# Altium PCB PCB1.PcbDoc
Units mm, origin at the board's own origin, x right, y up, seen from the top; angles counter-clockwise.
Board outline 191.39 x 165.1 mm, 2 copper layers (Top Layer, Bottom Layer); 70 components, 119 nets, 361 pads, 4 vias.
Unrouted connection lines stored in the file: 5.
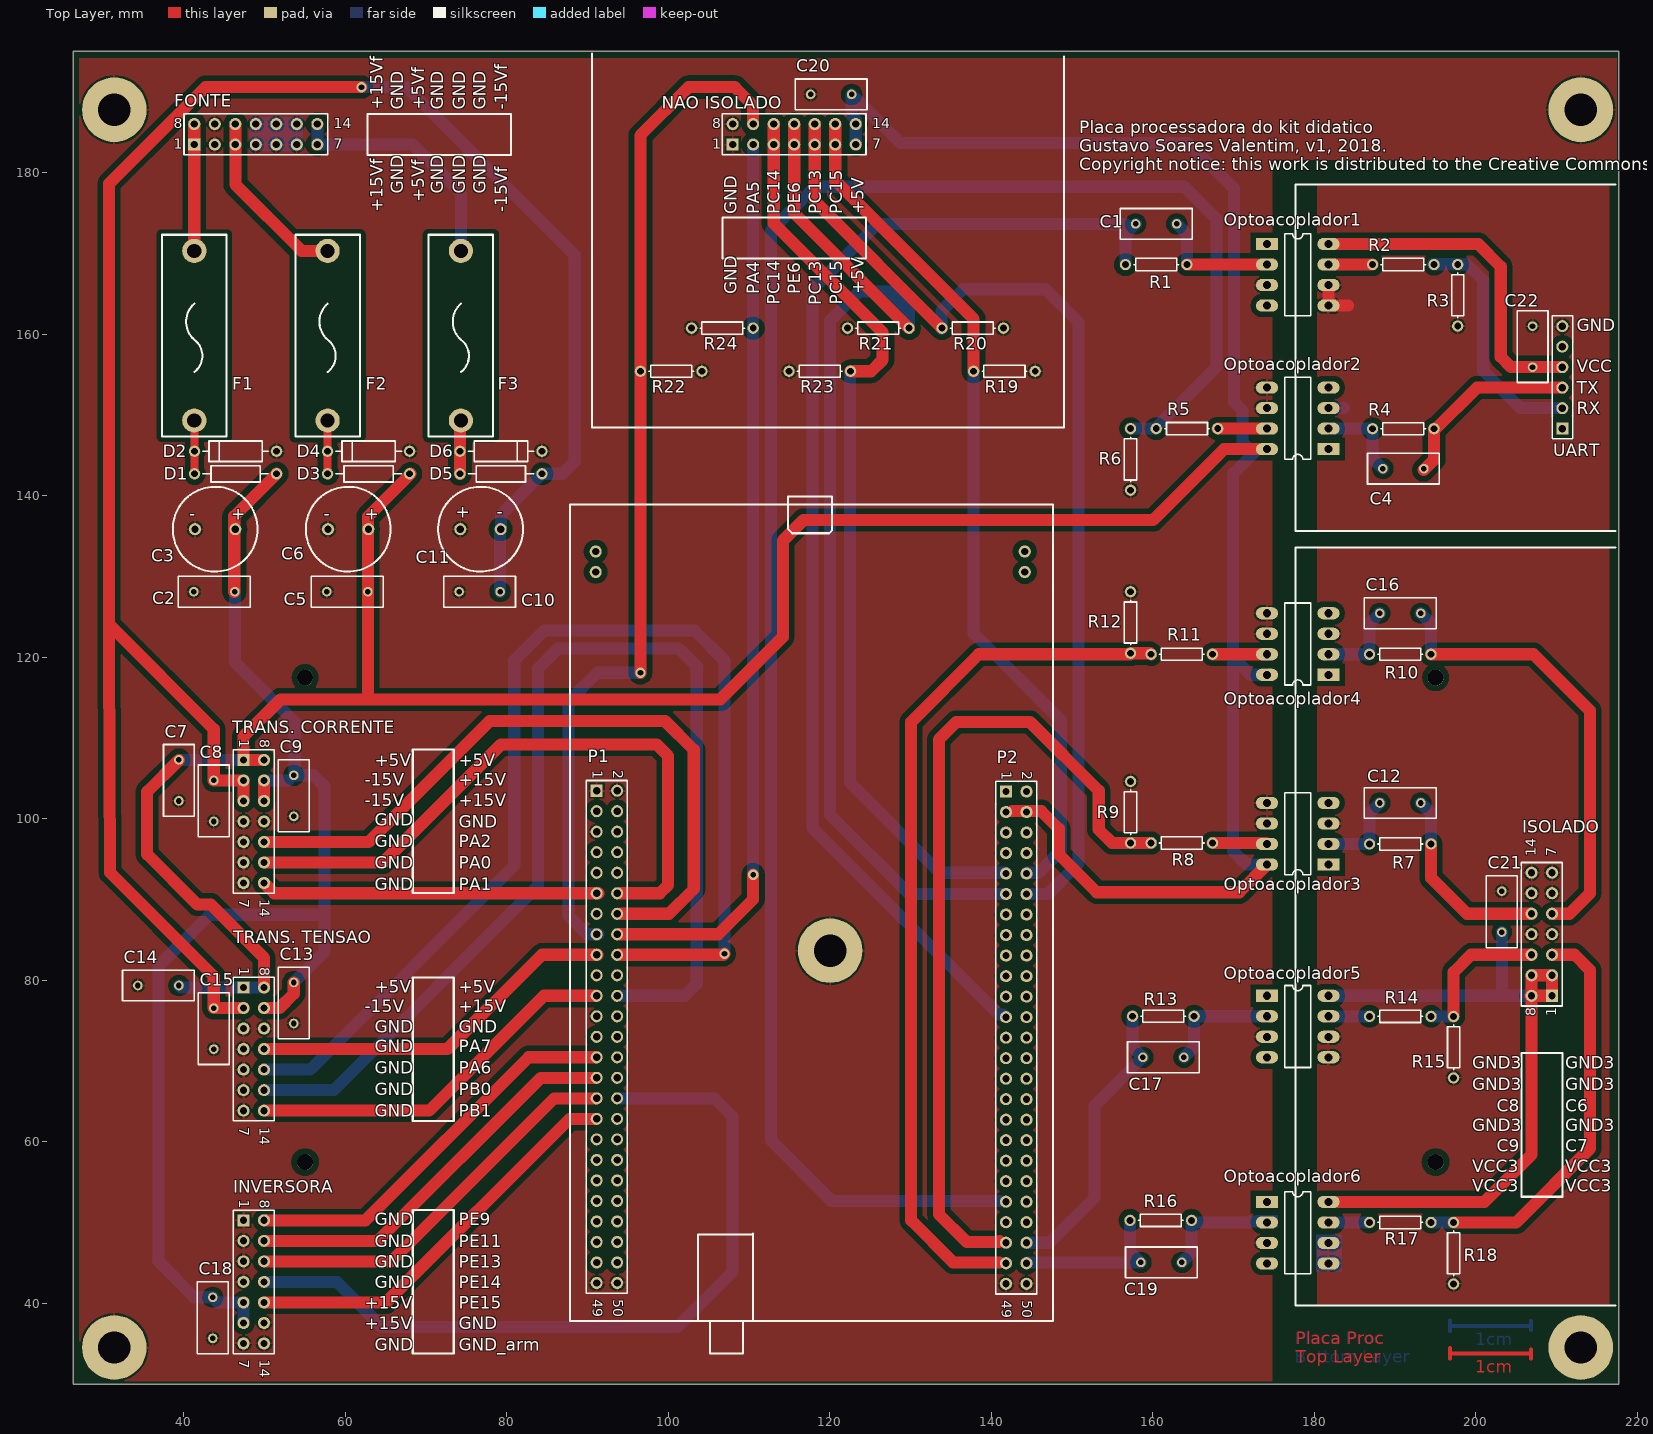
[diagram p0: Top Layer view]
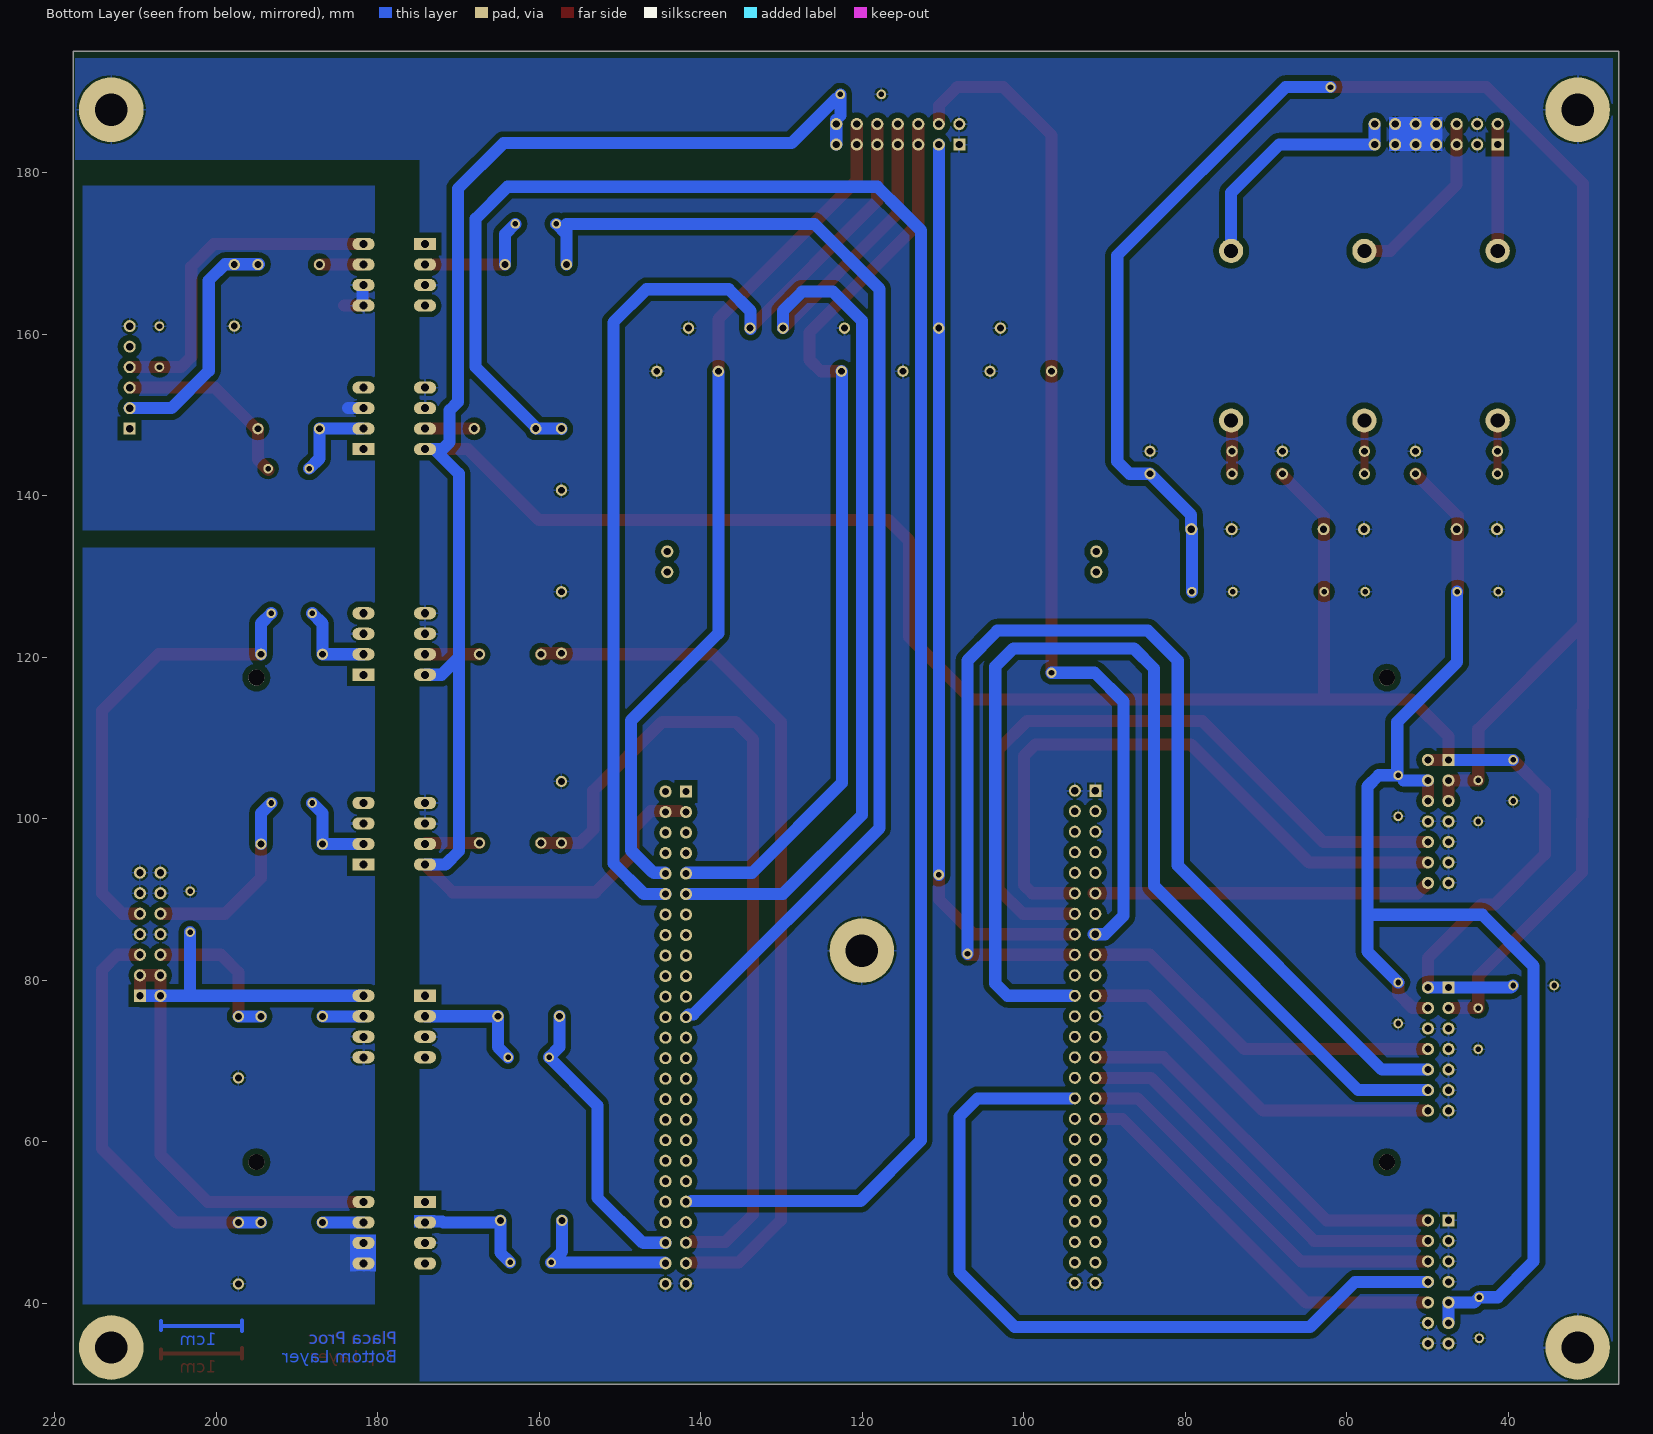
[diagram p1: Bottom Layer view, seen from below]

## Layer stack, top to bottom
Top Solder: solder mask 0.0102, Solder Resist, Dk 3.5
Top Layer: signal copper 0.0356
Dielectric 1: dielectric 0.32, FR-4, Dk 4.8
Bottom Layer: signal copper 0.0356
Bottom Solder: solder mask 0.0102, Solder Resist, Dk 3.5

## Board outline
26.289,195.072 26.289,29.972 217.678,29.972 217.678,195.072

## Design rules (kind name [scope] priority, off if disabled: settings)
Clearance Clearance_1 [All] p1: gap=0.7 ignorepadtopadclearanceinfootprint=FALSE
PlaneConnect [All] p1: planeconnectstyle=Direct reliefexpansion=0.508 reliefentries=4 reliefconductorwidth=0.254 reliefairgap=0.508
PolygonConnect [All] p1: connectstyle=Relief reliefconductorwidth=0.254 reliefentries=4 polygonreliefangle="90 Angle" airgapwidth=0.254
RoomDefinition "S bus (5.775 X 3.30 inches)" [InComponentClass('S bus (5.775 X 3.30 inches)')] p1: confinementstyle=ConfineOut formatcopy=TRUE lockcomponents=FALSE outline 358.775,194.945 298.45,194.945 298.45,25.4 358.775,25.4
RoutingVias [All] p1: holewidth=0.711 width=1.27 viastyle="Through Hole" minholewidth=0.711 minwidth=1.27 maxholewidth=0.711 maxwidth=1.27
SolderMaskExpansion [All] p1: expansion=0.102
Width [All] p1: maxlimit=1.5 minlimit=1 preferedwidth=1.5 minimp=50.000000 maximp=50.000000 favimp=50.000000 checkconnectedcopper=TRUE
29 further rules are at their usual default settings.

## Components (designator, comment, footprint, x,y, rotation, side; value= is the part's Value field where it differs from the comment)
C1 "Cerâmico 50 V 2" RAD-0.2 160.4,173.7 r180 top value=190pF
C2 "Cerâmico 50 V" RAD-0.2 43.753,128.143 r0 top value=100nF
C3 "Eletrolítico 50 V" RB5-10.5 43.863,135.89 r0 top value=10uF
C4 "Cerâmico 50 V 2" RAD-0.2 191.008,143.383 r0 top value=190pF
C5 "Cerâmico 50 V" RAD-0.2 60.225,128.143 r0 top value=100nF
C6 "Eletrolítico 50 V" RB5-10.5 60.335,135.89 r0 top value=10uF
C7 "Cerâmico 50 V" RAD-0.2 39.37,104.775 r90 top value=100nF
C8 "Cerâmico 50 V" RAD-0.2 43.688,102.235 r90 top value=100nF
C9 "Cerâmico 50 V" RAD-0.2 53.594,102.87 r90 top value=100nF
C10 "Cerâmico 50 V" RAD-0.2 76.608,128.143 r0 top value=100nF
C11 "Eletrolítico 50 V" RB5-10.5 76.718,135.89 r0 top value=10uF
C12 "Cerâmico 50 V 2" RAD-0.2 190.627,101.981 r0 top value=190pF
C13 "Cerâmico 50 V" RAD-0.2 53.594,77.216 r90 top value=100nF
C14 "Cerâmico 50 V" RAD-0.2 36.83,79.375 r0 top value=100nF
C15 "Cerâmico 50 V" RAD-0.2 43.688,74.041 r90 top value=100nF
C16 "Cerâmico 50 V 2" RAD-0.2 190.627,125.476 r0 top value=190pF
C17 "Cerâmico 50 V 2" RAD-0.2 161.29,70.485 r180 top value=190pF
C18 "Cerâmico 50 V" RAD-0.2 43.561,38.227 r270 top value=100nF
C19 "Cerâmico 50 V 2" RAD-0.2 161.036,45.085 r180 top value=190pF
C20 "Cerâmico 50 V" RAD-0.2 120.142,189.738 r180 top value=100nF
C21 "Cerâmico 50 V" RAD-0.2 203.2,88.519 r270 top value=100nF
C22 "Cerâmico 50 V" RAD-0.2 207.01,158.496 r270 top value=100nF
D1 "1N5822" AXIAL-0.4 46.393,142.748 r0 top
D2 "1N4745A" DIODE-0.4 46.393,145.542 r180 top
D3 "1N5822" AXIAL-0.4 62.865,142.748 r0 top
D4 "1N4735A" DIODE-0.4 62.865,145.542 r180 top
D5 "1N5822" AXIAL-0.4 79.248,142.748 r180 top
D6 "1N4745A" DIODE-0.4 79.248,145.542 r0 top
F1 "0.5 A" Fusivel 41.275,147.352 r90 top
F2 "0.5 A" Fusivel 57.785,147.352 r90 top
F3 "0.5 A" Fusivel 74.295,147.352 r90 top
FONTE "Header 7X2A" HDR2X7_CEN 41.275,183.515 r0 top
INVERSORA "Header 7X2A" HDR2X7_CEN 47.371,50.292 r270 top
ISOLADO "Header 7X2A" HDR2X7_CEN 209.423,78.105 r90 top
"NAO ISOLADO" "Header 7X2A" HDR2X7_CEN 107.95,183.515 r0 top
Optoacoplador1 "A2200" DIP8 174.117,171.196 r0 top
Optoacoplador2 "A2200" DIP8 181.737,145.796 r180 top
Optoacoplador3 "A2200" DIP8 181.737,94.361 r180 top
Optoacoplador4 "A2200" DIP8 181.737,117.856 r180 top
Optoacoplador5 "A2200" DIP8 174.117,78.105 r0 top
Optoacoplador6 "A2200" DIP8 174.117,52.578 r0 top
P1 "Header 25X2" HDR2X25 91.1,103.5 r270 top
P2 "Header 25X2" HDR2X25 141.8,103.4 r270 top
R1 "Res2" AXIAL-0.3 160.401,168.656 r0 top value=1K1
R2 "Res3" AXIAL-0.3 191.008,168.656 r0 top value=1K
R3 "Res4" AXIAL-0.3 197.739,164.846 r90 top value=5K
R4 "Res2" AXIAL-0.3 191.008,148.326 r180 top value=1K1
R5 "Res3" AXIAL-0.3 164.211,148.336 r180 top value=1K
R6 "Res4" AXIAL-0.3 157.226,144.526 r90 top value=5K
R7 "Res2" AXIAL-0.3 190.627,96.901 r180 top value=1K1
R8 "Res3" AXIAL-0.3 163.576,97.028 r180 top value=1K
R9 "Res4" AXIAL-0.3 157.226,100.838 r270 top value=5K
R10 "Res2" AXIAL-0.3 190.627,120.396 r180 top value=1K1
R11 "Res3" AXIAL-0.3 163.576,120.396 r180 top value=1K
R12 "Res4" AXIAL-0.3 157.226,124.333 r270 top value=5K
R13 "Res2" AXIAL-0.3 161.29,75.565 r0 top value=1K1
R14 "Res3" AXIAL-0.3 190.627,75.555 r0 top value=1K
R15 "Res4" AXIAL-0.3 197.231,71.745 r90 top value=5K
R16 "Res2" AXIAL-0.3 160.976,50.292 r0 top value=1K1
R17 "Res3" AXIAL-0.3 190.627,50.038 r0 top value=1K
R18 "Res4" AXIAL-0.3 197.231,46.228 r90 top value=5K
R19 "Res1" AXIAL-0.3 141.605,155.448 r0 top value=3.3K
R20 "Res1" AXIAL-0.3 137.668,160.782 r0 top value=3.3K
R21 "Res1" AXIAL-0.3 125.984,160.782 r180 top value=3.3K
R22 "Res1" AXIAL-0.3 100.33,155.448 r0 top value=3.3K
R23 "Res1" AXIAL-0.3 118.745,155.448 r180 top value=3.3K
R24 "Res1" AXIAL-0.3 106.68,160.782 r180 top value=3.3K
"TRANS. CORRENTE" "Header 7X2A" HDR2X7_CEN 47.371,107.315 r270 top
"TRANS. TENSAO" "Header 7X2A" HDR2X7_CEN 47.371,79.121 r270 top
UART "Header 6H" HDR1X6 210.693,148.336 r90 top

## Footprints (in the part's own frame and the unit in brackets; to place one, negate y for a bottom-side part, rotate by r counter-clockwise, add the part's x,y. Pads: shape width x height; smd on the part's side, far side on the other; paste and mask are expansions set on the pad)
AXIAL-0.3 [mm] "Axial Device, Thru-Hole; 2 Leads; 0.3 in Pin Spacing"
  round 1.4 hole 0.85: 1(-3.81,0) 2(3.81,0)
  silkscreen extent -2.77,-0.76 2.77,0.76
AXIAL-0.4 [mm] "Axial Device, Thru-Hole; 2 Leads; 0.4 in Pin Spacing"
  round 1.4 hole 0.85: 1(-5.08,0) 2(5.08,0)
  silkscreen extent -4.06,-1.02 4.06,1.02
DIODE-0.4 [mm] "Diode, Thru-Hole; 2 Leads; 0.4 in Pin Spacing"
  round 1.4 hole 0.85: 1(-5.08,0) 2(5.08,0)
  silkscreen extent -4.06,-1.27 4.06,1.27
DIP8 [mm]
  rect 2.75x1.5 hole 1: 1(0,0)
  oval 2.75x1.5 hole 1: 2(0,-2.54) 3(0,-5.08) 4(0,-7.62) 5(7.62,0) 6(7.62,-2.54) 7(7.62,-5.08) 8(7.62,-7.62)
  silkscreen extent 2.21,-8.89 5.41,1.27
Fusivel [mm]
  round 3 hole 1.75: 1(2,0) 2(23,0)
  silkscreen extent 0,-4 25,4, body extent 0,-4 25,4, height 20
HDR1X6 [mm]
  rect 1.5x1.5 hole 0.9: 1(0,0)
  round 1.5 hole 0.9: 2(2.54,0) 3(5.08,0) 4(7.62,0) 5(10.16,0) 6(12.7,0)
  silkscreen extent -1.27,-1.27 13.97,1.27, body extent -1.02,-1.02 13.72,1.02, height 5.08
HDR2X7_CEN [mm] "Connector; Header; 7x2 Position"
  rect 1.5x1.5 hole 0.9: 1(0,0)
  round 1.5 hole 0.9: 2(2.54,0) 3(5.08,0) 4(7.62,0) 5(10.16,0) 6(12.7,0) 7(15.24,0) 8(0,2.54) 9(2.54,2.54) 10(5.08,2.54) 11(7.62,2.54) 12(10.16,2.54) 13(12.7,2.54) 14(15.24,2.54)
  silkscreen extent -1.27,-1.27 16.51,3.81
HDR2X25 [mm] "Connector; Header; 25x2 Position"
  rect 1.5x1.5 hole 0.9: 1(0,0)
  round 1.5 hole 0.9: 2(0,2.54) 3(2.54,0) 4(2.54,2.54) 5(5.08,0) 6(5.08,2.54) 7(7.62,0) 8(7.62,2.54) 9(10.16,0) 10(10.16,2.54) 11(12.7,0) 12(12.7,2.54) 13(15.24,0) 14(15.24,2.54) 15(17.78,0) 16(17.78,2.54) 17(20.32,0) 18(20.32,2.54) 19(22.86,0) 20(22.86,2.54) 21(25.4,0) 22(25.4,2.54) 23(27.94,0) 24(27.94,2.54) 25(30.48,0) 26(30.48,2.54) 27(33.02,0) 28(33.02,2.54) 29(35.56,0) 30(35.56,2.54) 31(38.1,0) 32(38.1,2.54) 33(40.64,0) 34(40.64,2.54) 35(43.18,0) 36(43.18,2.54) 37(45.72,0) 38(45.72,2.54) 39(48.26,0) 40(48.26,2.54) 41(50.8,0) 42(50.8,2.54) 43(53.34,0) 44(53.34,2.54) 45(55.88,0) 46(55.88,2.54) 47(58.42,0) 48(58.42,2.54) 49(60.96,0) 50(60.96,2.54)
  silkscreen extent -1.27,-1.27 62.23,3.81
RAD-0.2 [mm] "Radial Cap, Thru-Hole; 2 Leads; 0.2 in Pin Spacing"
  round 1.2 hole 0.7: 1(-2.54,0) 2(2.54,0)
  silkscreen extent -4.44,-1.91 4.44,1.91
RB5-10.5 [mm] "Capacitor (Radial); 2 Leads"
  round 1.5 hole 0.9: 1(-2.5,0) 2(2.5,0)
  silkscreen extent -5.25,-5.25 5.25,5.25

## Part data
C1 C2 C3 C4 C5 C6 C7 C8 C9 C10 C11 C12 C13 C14 C15 C16 C17 C18 C19 C20 C21 C22: library part Cap, "Capacitor", LatestRevisionDate=17-Jul-2002, LatestRevisionNote="Re-released for DXP Platform.", PackageDescription="Radial Cap, Thru-Hole; 2 Leads; 0.3 in Pin Spacing", PackageReference=RAD-0.3, Published=8-Jun-2000, Publisher="Altium Limited"
D1 D3 D5: library part Diode, "Default Diode", Code_JEDEC=DO-214-AB, LatestRevisionDate=17-Jul-2002, LatestRevisionNote="Re-released for DXP Platform.", PackageDescription="DO-214-AB/SMC; 2 C-Bend Leads; Body 7.9 x 5.9 mm, inc. leads (LxW)", PackageReference=SMC, PackageVersion=Sep-1996, Published=8-Jun-2000, Publisher="Altium Limited"
D2 D4 D6: library part "D Zener", "Zener Diode", LatestRevisionDate=17-Jul-2002, LatestRevisionNote="Re-released for DXP Platform.", PackageDescription="Diode, Thru-Hole; 2 Leads; 0.7 in Pin Spacing", PackageReference=DIODE-0.7, Published=8-Jun-2000, Publisher="Altium Limited"
F1 F2 F3: library part "Fuse 2", "Fuse", LatestRevisionDate=17-Jul-2002, LatestRevisionNote="Re-released for DXP Platform.", PackageDescription="Thru-Hole; 2 Leads", PackageReference=PIN-W2/E2.8, Published=8-Jun-2000, Publisher="Altium Limited"
FONTE INVERSORA ISOLADO "NAO ISOLADO" "TRANS. CORRENTE" "TRANS. TENSAO": "Header, 7-Pin, Dual row", LatestRevisionDate=17-Jul-2002, LatestRevisionNote="Re-released for DXP Platform.", Publisher="Altium Limited"
Optoacoplador1 Optoacoplador2 Optoacoplador3 Optoacoplador4 Optoacoplador5 Optoacoplador6: library part Optoacoplador
P1 P2: "Header, 25-Pin, Dual row", LatestRevisionDate=17-Jul-2002, LatestRevisionNote="Re-released for DXP Platform.", Publisher="Altium Limited"
R1 R2 R3 R4 R5 R6 R7 R8 R9 R10 R11 R12 R13 R14 R15 R16 R17 R18: library part Res1, "Resistor", LatestRevisionDate=17-Jul-2002, LatestRevisionNote="Re-released for DXP Platform.", PackageDescription="Axial Device, Thru-Hole; 2 Leads; 0.3 in Pin Spacing", PackageReference=AXIAL-0.3, Published=8-Jun-2000, Publisher="Altium Limited"
R19 R20 R21 R22 R23 R24: "Resistor", LatestRevisionDate=17-Jul-2002, LatestRevisionNote="Re-released for DXP Platform.", PackageDescription="Axial Device, Thru-Hole; 2 Leads; 0.3 in Pin Spacing", PackageReference=AXIAL-0.3, Published=8-Jun-2000, Publisher="Altium Limited"
UART: "Header, 6-Pin, Right Angle", LatestRevisionDate=17-Jul-2002, LatestRevisionNote="Re-released for DXP Platform.", Publisher="Altium Limited"

## Free pads (board coordinates)
  round 8 hole 4: 10(31.369,34.544) 10(31.369,187.833) 10(120.015,83.693) 10(212.979,34.544) 10(212.979,187.833)
  round 1.5 hole 0.9: 11(90.983,130.583) 11(90.983,133.123)
  round 1.524 hole 0.9: 11(144.121,130.583) 11(144.121,133.123)
  round 2 hole 2 paste+2: 12(55,117.5) 13(55,57.5) 14(195,57.5) 15(195,117.5)

## Via types
v1: diameter 1.27, hole 0.711, Top Layer to Bottom Layer, 4 vias

## Nets (pads, with @x,y where several pads share a name; then routed paths per layer and width w, separated by ;. In a path a pad name is that pad's centre, name@x,y a point inside that pad or via, vN(x,y) a via of type N, cw(c..) or ccw(c..) an arc to the next point about the centre after c; other vN are vias at no path point)
"+3 V ARM": P2.6
"+ 3 V ARM": P2.5
"+ 5 V": "NAO ISOLADO.7" "NAO ISOLADO.14" "TRANS. CORRENTE.1" "TRANS. CORRENTE.8" "TRANS. TENSAO.1" "TRANS. TENSAO.8" C5.2 C6.2 C7.2 C14.2 C20.1 D3.2 Optoacoplador2.5 Optoacoplador3.5 Optoacoplador4.5 P2.3 P2.4 | length 431.6
  Top Layer w1.5: C7.2 35.433,103.378 35.433,95.631 41.656,89.408 43.307,89.408 49.911,82.804 49.911,79.121 ; 49.911,107.315 47.371,107.315 47.371,110.236 51.943,114.808 106.426,114.808 114.173,122.555 114.173,134.493 116.713,137.033 160.02,137.033 168.783,145.796 Optoacoplador2.5 Optoacoplador2.5@174.244,145.796 ; 62.865,115.189 62.765,115.289 C5.2 62.765,137.441 D3.2@68.072,142.748 ; 142.621,100.965 146.177,100.965 148.336,98.806 148.336,95.631 153.035,90.932 170.688,90.932 Optoacoplador3.5
  Bottom Layer w1.5: C14.2 39.624,79.121 47.371,79.121 49.911,79.121 ; C7.2 47.371,107.315 ; 122.682,187.134 C20.1 ; 123.19,183.515 123.19,186.055 123.19,186.626 ; 123.19,189.23 128.72,183.7 164.4,183.7 170.053,178.047 170.053,151.638 171.069,150.622 171.069,146.685 171.958,145.796 Optoacoplador2.5@172.974,145.796 ; Optoacoplador3.5 171.577,94.361 169.926,96.012 169.926,120.015 ; Optoacoplador4.5 172.085,117.856 169.926,120.015 ; Optoacoplador2.5 Optoacoplador2.5@172.974,145.796 ; 169.926,120.015 169.926,142.748 Optoacoplador2.5@172.974,145.796
"+ 5 Vf": F2.2 FONTE.3 FONTE.10 | length 22.3
  Top Layer w1.5: FONTE.10 FONTE.3 46.355,178.562 54.565,170.352 F2.2
"+ 15 V": "TRANS. CORRENTE.9" "TRANS. CORRENTE.10" "TRANS. TENSAO.9" C2.2 C3.2 C9.2 C13.2 C18.1 D1.2 INVERSORA.5 INVERSORA.6 | length 159.1
  Top Layer w0: C3.2@46.293,135.828 C3.2@46.355,135.89
  Top Layer w1.5: C2.2@46.228,128.143 46.228,137.503 D1.2 ; 49.911,76.581 51.816,76.581 53.594,78.359 C13.2 ; 49.911,102.235 49.911,104.775
  Bottom Layer w1.5: C2.2 46.293,119.442 53.721,112.014 53.721,105.41 56.007,105.41 57.404,104.013 57.404,88.138 ; INVERSORA.6 INVERSORA.5 44.196,40.132 C18.1 41.275,40.767 36.83,45.212 36.83,81.788 43.18,88.138 57.404,88.138 ; 49.911,104.775 52.959,104.775 ; C13.2 57.404,83.566 57.404,88.138
"+ 15 Vf": F1.2 FONTE.1 FONTE.8 | length 16.1
  Top Layer w1.5: F1.2@41.275,169.971 F1.2 FONTE.1 FONTE.8
"- 15 V": "TRANS. CORRENTE.2" "TRANS. CORRENTE.3" "TRANS. TENSAO.2" C8.2 C10.2 C11.2 C15.2 D5.1 | length 260.1
  Top Layer w1.5: 47.371,76.581 C15.2 43.688,80.518 30.852,93.354 30.725,120.419 30.734,120.428 30.734,124.079 ; 47.371,102.235 47.371,104.775 C8.2 43.688,111.125 30.734,124.079 ; v1(61.976,190.627) 42.672,190.627 30.734,178.689 30.734,124.079
  Bottom Layer w1.5: v1(61.976,190.627) 67.564,190.627 88.392,169.799 88.392,144.272 86.868,142.748 D5.1 79.248,137.668 C11.2@79.248,136.017 ; C10.2 79.148,135.79 C11.2@79.248,135.89
"- 15 Vf": F3.2 FONTE.7 FONTE.14 | length 29.9
  Bottom Layer w1.5: FONTE.14 FONTE.7 68.326,183.515 74.295,177.546 F3.2@74.295,170.434
BOOT0: P2.21
C6: C16.2 ISOLADO.5 R10.1 | length 56.5
  Top Layer w1.5: R10.1 207.137,120.396 214.122,113.411 214.122,90.805 211.582,88.265 ISOLADO.5
  Bottom Layer w1.5: C16.2 194.437,124.206 R10.1
C7: ISOLADO.3 R17.2 R18.2 | length 51.1
  Top Layer w1.5: R18.2 204.978,50.038 214.122,59.182 214.122,81.28 212.217,83.185 ISOLADO.3
  Bottom Layer w1.5: R17.2 R18.2
C8: C12.2 ISOLADO.12 R7.1 | length 24.1
  Top Layer w1.5: R7.1 194.437,92.71 198.882,88.265 ISOLADO.12
  Bottom Layer w1.5: C12.2 194.437,100.711 R7.1
C9: ISOLADO.10 R14.2 R15.2 | length 18.8
  Top Layer w1.5: R15.2 197.231,81.026 199.39,83.185 ISOLADO.10
  Bottom Layer w1.5: R14.2 R15.2
GND: "NAO ISOLADO.1" "NAO ISOLADO.8" "TRANS. CORRENTE.4" "TRANS. CORRENTE.5" "TRANS. CORRENTE.6" "TRANS. CORRENTE.7" "TRANS. CORRENTE.11" "TRANS. TENSAO.3" "TRANS. TENSAO.4" "TRANS. TENSAO.5" "TRANS. TENSAO.6" "TRANS. TENSAO.7" "TRANS. TENSAO.10" C2.1 C3.1 C5.1 C6.1 C7.1 C8.1 C9.1 C10.1 C11.1 C13.1 C14.1 C15.1 C18.2 C20.2 D2.1 D4.1 D6.2 FONTE.2 FONTE.4 FONTE.5 FONTE.6 FONTE.9 FONTE.11 FONTE.12 FONTE.13 INVERSORA.1 INVERSORA.2 INVERSORA.3 INVERSORA.4 INVERSORA.7 INVERSORA.13 INVERSORA.14 Optoacoplador1.3 Optoacoplador2.7 Optoacoplador2.8 Optoacoplador3.7 Optoacoplador3.8 Optoacoplador4.7 Optoacoplador4.8 Optoacoplador5.3 Optoacoplador6.3 P1.1 P1.2 P1.5 P1.23 P1.49 P1.50 P2.49 P2.50 pad.10 R6.1 R9.1 R12.1 R19.2 R20.2 R21.2 R22.2 R23.2 R24.2
"GND ARM": P2.1 P2.2
"GND uart": C22.1 Optoacoplador1.7 Optoacoplador1.8 Optoacoplador2.3 R3.1 UART.6 | length 9.3
  Top Layer w1.5: Optoacoplador1.7@181.61,166.116 181.737,165.989 Optoacoplador1.8 184.15,163.576
  Bottom Layer w1.5: Optoacoplador2.3@181.864,150.876 183.642,150.876 ; Optoacoplador1.8@181.864,163.576 Optoacoplador1.7@181.864,166.116
GND_3: C21.1 ISOLADO.4 ISOLADO.6 ISOLADO.7 ISOLADO.11 ISOLADO.13 ISOLADO.14 Optoacoplador3.3 Optoacoplador4.3 Optoacoplador5.7 Optoacoplador5.8 Optoacoplador6.7 Optoacoplador6.8 R15.1 R18.1
NC: P1.48
NetC1_1: C1.1 Optoacoplador1.2 R1.2 | length 14.1
  Top Layer w1.5: R1.2 Optoacoplador1.2@172.974,168.656
  Bottom Layer w1.5: C1.1 164.2,172.44 164.2,171.1 ; R1.2 164.211,170.889
NetC4_1: C4.1 Optoacoplador2.2 R4.2 | length 10.8
  Bottom Layer w1.5: Optoacoplador2.2@181.864,148.336 187.188,148.336 R4.2 187.198,144.653 C4.1
NetC12_1: C12.1 Optoacoplador3.2 R7.2 | length 10.7
  Bottom Layer w1.5: Optoacoplador3.2 R7.2 186.817,100.711 C12.1
NetC16_1: C16.1 Optoacoplador4.2 R10.2 | length 10.7
  Bottom Layer w1.5: Optoacoplador4.2 R10.2 186.817,124.206 C16.1
NetC17_1: C17.1 Optoacoplador5.2 R13.2 | length 14.8
  Top Layer w0: Optoacoplador5.2@173.99,75.692 Optoacoplador5.2
  Bottom Layer w1.5: C17.1 165.1,71.755 R13.2 Optoacoplador5.2
NetC19_1: C19.1 Optoacoplador6.2 R16.2 | length 15.2
  Bottom Layer w1.5: C19.1 164.786,46.295 R16.2 165.04,50.038 171.86,50.038 171.987,50.165 173.99,50.165 Optoacoplador6.2
NetD1_1: D1.1 D2.2 F1.1 | length 6.5
  Top Layer w1: D1.1 D2.2 41.313,149.136 F1.1@41.402,149.225
NetD3_1: D3.1 D4.2 F2.1 | length 6.6
  Top Layer w1: D3.1 D4.2 F2.1
NetD5_2: D5.2 D6.1 F3.1 | length 6.4
  Top Layer w1.5: D5.2 D6.1 74.168,148.971 F3.1@74.295,149.098
NetOptoacoplador1_6: Optoacoplador1.6 R2.1 | length 5.3
  Top Layer w1.5: Optoacoplador1.6@181.864,168.656 R2.1
NetOptoacoplador2_6: Optoacoplador2.6 R5.1 | length 6.2
  Top Layer w1.5: R5.1 Optoacoplador2.6 Optoacoplador2.6@174.244,148.336
NetOptoacoplador3_6: Optoacoplador3.6 R8.1 | length 6.8
  Top Layer w1.5: R8.1 173.99,97.028 Optoacoplador3.6
NetOptoacoplador4_6: Optoacoplador4.6 R11.1 | length 6.7
  Top Layer w1.5: R11.1 Optoacoplador4.6
NetOptoacoplador5_6: Optoacoplador5.6 R14.1 | length 5.1
  Bottom Layer w1.5: Optoacoplador5.6 181.747,75.555 R14.1 R14.1@186.807,75.565
NetOptoacoplador6_6: Optoacoplador6.6 R17.1 | length 5.1
  Bottom Layer w1.5: Optoacoplador6.6 R17.1
NRST: P1.6
PA0: "TRANS. CORRENTE.13" P1.12 | length 79
  Top Layer w1.5: 49.911,94.615 64.643,94.615 79.248,109.22 98.552,109.22 99.961,107.811 99.961,91.833 98.933,90.805 P1.12@94,90.805
PA1: "TRANS. CORRENTE.14" P1.11 | length 41.9
  Top Layer w1.5: 49.911,92.075 51.181,90.805 P1.11@91.3,90.805
PA2: "TRANS. CORRENTE.12" P1.14 | length 88.5
  Top Layer w1.5: 49.911,97.155 62.865,97.155 77.851,112.141 99.568,112.141 103.124,108.585 103.124,91.313 100.076,88.265 P1.14@94.1,88.265
PA3: P1.13
PA4: "NAO ISOLADO.2" P1.16 R24.1 | length 111.9
  Top Layer w1.5: P1.16@93.9,85.725 106.172,85.725 110.49,90.043 v1(110.49,93.091)
  Bottom Layer w1.5: v1(110.49,93.091) R24.1 110.49,183.515
PA5: "NAO ISOLADO.9" P1.15 R22.1 | length 127.7
  Top Layer w1.5: v1(96.52,118.11) R22.1 96.52,184.658 102.489,190.627 108.204,190.627 110.49,188.341 110.49,186.055
  Bottom Layer w1.5: P1.15@91.3,85.725 89.916,85.725 87.63,88.011 87.63,114.554 91.186,118.11 v1(96.52,118.11)
PA6: "TRANS. TENSAO.12" P1.18 | length 145.4
  Top Layer w1.5: P1.18@93.9,83.185 106.807,83.185 v1(106.934,83.312)
  Bottom Layer w1.5: 49.911,68.961 55.626,68.961 80.899,94.234 80.899,119.634 84.582,123.317 103.251,123.317 106.934,119.634 v1(106.934,83.312)
PA7: "TRANS. TENSAO.11" P1.17 | length 46.1
  Top Layer w1.5: 49.911,71.501 72.644,71.501 84.328,83.185 P1.17@91.2,83.185
PA8: P2.43
PA9: P2.44
PA10: P2.41 R5.2 R6.2 | length 235.6
  Bottom Layer w1.5: P2.41@141.1,52.7 120.2,52.7 112.69,60.21 112.69,172.89 115.1,175.3 118.1,178.3 163.9,178.3 167.853,174.347 167.853,155.953 R5.2@160.236,148.336 ; R6.2@157.2,148.3 157.236,148.336 R5.2@160.236,148.336 ; R5.2 R5.2@160.236,148.336
PA13: P2.42
PA14: P2.39
PA15: P2.40
PB0: "TRANS. TENSAO.13" P1.22 | length 142.2
  Bottom Layer w1.5: 49.911,66.421 58.547,66.421 83.82,91.694 83.82,118.618 86.319,121.117 101.26,121.117 103.505,118.872 103.505,79.629 101.981,78.105 P1.22@94.1,78.105
PB1: "TRANS. TENSAO.14" P1.21 | length 47.1
  Top Layer w1.5: 49.911,63.881 70.358,63.881 84.582,78.105 P1.21@91.1,78.105
PB2: P1.24
PB3: P2.28
PB4: P2.25
PB5: P2.26
PB6: C1.2 P2.23 R1.1 | length 149.3
  Bottom Layer w1.5: P2.23 141.46,75.8 140.889,75.8 117.824,98.865 117.824,165.624 125.9,173.7 156.6,173.7 156.6,172.44 ; R1.1@156.6,168.7 156.6,172.44 ; C1.2 156.6,172.44
PB7: P2.24
PB8: P2.19
PB9: P2.20
PB10: P1.34
PB11: P1.35
PB12: P1.36
PB13: P1.37
PB14: P1.38
PB15: P1.39
PC0: P1.8
PC1: P1.7
PC2: P1.10
PC3: P1.9
PC4: P1.20
PC5: P1.19
PC6: P2.47 R11.2 R12.2 | length 108.1
  Top Layer w1.5: 140.985,45.085 135.255,45.085 130.048,50.292 130.048,112.014 138.43,120.396 R12.2@157.226,120.396 ; R12.2 159.639,120.523 R11.2
PC7: C19.2 P2.48 R16.1 | length 19.9
  Bottom Layer w1.5: P2.48@144.4,45.085 C19.2 157.166,46.415 R16.1
PC8: P2.45 R8.2 R9.2 | length 104
  Top Layer w1.5: 141,47.7 140.9,47.6 136.931,47.6 133.477,51.054 133.477,109.855 135.636,112.014 144.78,112.014 153.289,103.505 153.289,98.679 154.94,97.028 R9.2 R8.2
PC9: C17.2 P2.46 R13.1 | length 35.9
  Bottom Layer w1.5: P2.46 147.08,47.52 ; 147.32,47.625 152.781,53.086 152.781,64.516 C17.2 157.48,71.755 R13.1
PC10: P2.37
PC11: P2.38
PC12: P2.35
PC13: "NAO ISOLADO.5" "NAO ISOLADO.12" P2.12 R20.1 | length 128.8
  Top Layer w1.5: 118.11,186.055 118.11,183.515 118.11,176.53 R20.1
  Bottom Layer w1.5: R20.1@133.8,160.7 133.8,162.9 136.5,165.6 146.7,165.6 150.8,161.5 150.8,94.5 147,90.7 P2.12
PC14: "NAO ISOLADO.3" "NAO ISOLADO.10" P2.9 R23.1 | length 114.1
  Top Layer w1.5: 113.03,186.055 113.03,183.515 113.03,173.736 126.492,160.274 126.492,156.845 125.095,155.448 R23.1
  Bottom Layer w1.5: R23.1 122.5,155.393 122.5,104.449 133.604,93.345 P2.9@141.7,93.345
PC15: "NAO ISOLADO.6" "NAO ISOLADO.13" P2.10 R19.1 | length 106.5
  Top Layer w1.5: 120.65,186.055 120.65,183.515 120.65,179.07 137.795,161.925 R19.1
  Bottom Layer w1.5: R19.1@137.795,155.321 137.795,123.005 148.6,112.2 148.6,96.1 145.941,93.441 ; P2.10@144.4,93.34 145.74,93.34
PD0: P2.36
PD1: P2.33
PD2: P2.34
PD3: P2.31
PD4: P2.32
PD5: P2.29
PD6: P2.30
PD7: P2.27
PD8: P1.40
PD9: P1.41
PD10: P1.42
PD11: P1.43
PD12: P1.44
PD13: P1.45
PD14: P1.46
PD15: P1.47
PE0: P2.17
PE1: P2.18
PE2: P2.15
PE3: P2.16
PE4: P2.13
PE5: P2.14
PE6: "NAO ISOLADO.4" "NAO ISOLADO.11" P2.11 R21.1 | length 132.6
  Top Layer w1.5: 115.57,186.055 115.57,183.515 115.57,175.006 R21.1
  Bottom Layer w1.5: R21.1@129.8,160.8 129.8,162.9 127.4,165.3 123.6,165.3 120.024,161.724 120.024,100.476 129.8,90.7 P2.11
PE7: P1.25
PE8: P1.26
PE9: INVERSORA.8 P1.27 | length 49.6
  Top Layer w1.5: INVERSORA.8 62.484,50.292 82.677,70.485 P1.27@91.1,70.485
PE10: P1.28
PE11: INVERSORA.9 P1.29 | length 49.6
  Top Layer w1.5: INVERSORA.9 64.008,47.752 84.201,67.945 P1.29@91.1,67.945
PE12: P1.30
PE13: INVERSORA.10 P1.31 | length 49.6
  Top Layer w1.5: INVERSORA.10 65.659,45.212 85.852,65.405 P1.31@91.1,65.405
PE14: INVERSORA.11 P1.32 | length 97.3
  Bottom Layer w1.5: INVERSORA.11 58.928,42.672 64.516,37.084 101.092,37.084 107.95,43.942 107.95,63.119 105.664,65.405 P1.32@94,65.405
PE15: INVERSORA.12 P1.33 | length 50.6
  Top Layer w1.5: INVERSORA.12 65.024,40.132 87.757,62.865 P1.33@91.1,62.865
PH0: P2.7
PH1: P2.8
RX: R2.2 R3.2 UART.2 | length 29.9
  Bottom Layer w1.5: R2.2@194.7,168.7 198.9,168.7 200.9,166.7 200.9,155.5 205.524,150.876 UART.2
TX: C4.2 R4.1 UART.3 | length 23.6
  Top Layer w1.5: C4.2@193.5,143.2 194.818,144.518 R4.1 ; R4.1@194.9,148.2 200.116,153.416 UART.3
VCC_3: C21.2 ISOLADO.1 ISOLADO.2 ISOLADO.8 ISOLADO.9 Optoacoplador5.5 Optoacoplador6.5 | length 93
  Top Layer w1.5: Optoacoplador6.5 201.041,52.578 206.883,58.42 ISOLADO.8 ISOLADO.1 ISOLADO.2 ISOLADO.9 206.883,78.232 ISOLADO.8@206.756,78.105
  Bottom Layer w1.5: Optoacoplador5.5 203.2,78.105 ; C21.2 203.2,78.105 ; ISOLADO.1 ISOLADO.8 203.2,78.105
VCC_uart: C22.2 Optoacoplador1.5 UART.4 | length 41.7
  Top Layer w1.5: Optoacoplador1.5@181.864,171.196 200.279,171.196 203.073,168.402 203.073,157.226 204.343,155.956 C22.2 UART.4
VDD: P1.3 P1.4 P2.22
pads on no net: Optoacoplador1.1 Optoacoplador1.4 Optoacoplador2.1 Optoacoplador2.4 Optoacoplador3.1 Optoacoplador3.4 Optoacoplador4.1 Optoacoplador4.4 Optoacoplador5.1 Optoacoplador5.4 Optoacoplador6.1 Optoacoplador6.4 UART.1 UART.5
copper on no net: | length 24.8
  Top Layer w0.5: 196.8,33.2 196.8,34.5 ; 196.8,33.8 206.8,33.8 ; 206.8,33.2 206.8,34.3
  Bottom Layer w0.5: 196.8,36.6 196.8,37.9 ; 196.8,37.2 206.8,37.2 ; 206.8,36.7 206.8,37.8

## Polygon pours and split planes (outlines as drawn)
GND_3 on Top Layer "GND_3_L01_P012" (solid, remove dead copper, pour order 12): 180.34,133.604 180.34,39.878 216.535,39.878 216.535,133.604
GND on Top Layer "GND_L01_P018" (solid, remove dead copper, pour order 18): 27.051,194.183 27.051,30.353 174.752,30.353 174.752,37.846 174.752,38.862 174.752,181.61 217.424,181.61 217.424,194.183 150.622,194.183 90.17,194.183
"GND uart" on Top Layer "GND_UART_L01_P008" (solid, remove dead copper, pour order 8): 180.34,178.435 216.535,178.435 216.535,135.763 180.34,135.763
GND_3 on Bottom Layer "GND_3_L02_P014" (solid, remove dead copper, pour order 14): 180.34,39.878 180.34,133.604 216.535,133.604 216.535,39.878
"GND uart" on Bottom Layer "GND_UART_L02_P010" (solid, remove dead copper, pour order 10): 180.34,178.435 216.535,178.435 216.535,135.763 180.34,135.763
GND on Bottom Layer "GND_L02_P020" (solid, remove dead copper, pour order 20): 27.051,194.183 27.051,30.353 174.752,30.353 174.752,37.846 174.752,181.61 217.424,181.61 217.424,194.183 150.622,194.183 90.17,194.183

## Other copper
Top Layer:
  text "Placa Proc / Top Layer" at 177.673,32.639 h1.52
  text "1cm" at 199.9,31.4 h1.52
Bottom Layer:
  rectangle net NetC19_1: 172.847,49.403 175.514,50.927
  rectangle net GND_3: 180.213,43.942 183.388,48.514
  rectangle net GND: 48.133,182.753 54.737,186.944
  text "1cm" at 199.9,34.8 h1.52
  text "Placa Proc / Bottom Layer" at 177.546,32.639 h1.52

## Silkscreen, mask and mechanical layers (free items; w line width, h text height)
Top Overlay:
  lines w0.254: 90.551,194.818 90.551,192.405 90.551,148.463 148.971,148.463 148.971,188.468 148.971,194.437 ; 103.632,37.846 103.632,48.514 110.363,48.514 110.49,48.641 110.49,37.846 105.156,37.846 105.156,33.782 109.22,33.782 109.22,37.846 ; 217.043,135.636 217.297,135.636 177.673,135.636 177.673,178.562 212.852,178.562 217.297,178.562 ; 217.297,39.751 203.581,39.751 177.673,39.751 177.673,133.604 217.297,133.604 ; 62.738,182.245 62.738,187.325 80.518,187.325 80.518,182.245 62.738,182.245 ; 68.326,33.782 73.406,33.782 73.406,51.562 68.326,51.562 68.326,33.782 ; 68.326,62.611 73.406,62.611 73.406,80.391 68.326,80.391 68.326,62.611 ; 68.326,90.805 68.326,108.585 73.406,108.585 73.406,90.805 68.326,90.805 ; 87.8,37.846 147.6,37.846 147.6,138.938 87.8,138.938 87.8,37.846 ; 106.68,169.418 124.46,169.418 124.46,174.498 106.68,174.498 106.68,169.418 ; 114.808,135.89 115.316,135.382 117.602,135.382 119.888,135.382 120.269,135.763 120.269,139.954 114.808,139.954 114.808,135.89 ; 205.613,53.213 210.693,53.213 210.693,70.993 205.613,70.993 205.613,53.213
  text "+15Vf" at 64.643,187.833 h1.52 r90
  text "GND" at 67.183,187.833 h1.52 r90
  text "+5Vf" at 69.723,187.833 h1.52 r90
  text "GND" at 72.136,187.833 h1.52 r90
  text "GND" at 74.803,187.833 h1.52 r90
  text "GND" at 77.343,187.833 h1.52 r90
  text "-15Vf" at 80.01,187.833 h1.52 r90
  text "Placa processadora do kit didatico / Gustavo Soares Valentim, v1, 2018. / Copyright notice: this work is distributed to the Creative Commons Atribution. Share-Alike." at 150.876,180.34 h1.52
  text "GND" at 67.183,177.418 h1.52 r90
  text "GND" at 72.136,177.418 h1.52 r90
  text "GND" at 74.803,177.418 h1.52 r90
  text "GND" at 77.343,177.418 h1.52 r90
  text "+5Vf" at 69.723,176.403 h1.52 r90
  text "+15Vf" at 64.643,175.133 h1.52 r90
  text "-15Vf" at 80.01,175.133 h1.52 r90
  text "GND" at 108.458,174.879 h1.52 r90
  text "PA5" at 111.252,174.879 h1.52 r90
  text "PC14" at 113.792,174.879 h1.52 r90
  text "PE6" at 116.332,174.879 h1.52 r90
  text "PC13" at 118.9,174.879 h1.52 r90
  text "PC15" at 121.539,174.879 h1.52 r90
  text "+5V" at 124.206,174.879 h1.52 r90
  text "GND" at 108.458,164.973 h1.52 r90
  text "PA4" at 111.252,164.973 h1.52 r90
  text "PE6" at 116.332,164.973 h1.52 r90
  text "+5V" at 124.206,164.973 h1.52 r90
  text "PC14" at 113.792,163.703 h1.52 r90
  text "PC15" at 121.539,163.703 h1.52 r90
  text "PC13" at 118.9,163.6 h1.52 r90
  text "GND" at 212.471,160.401 h1.52
  text "VCC" at 212.471,155.321 h1.52
  text "TX" at 212.471,152.654 h1.52
  text "RX" at 212.471,150.114 h1.52
  text "+" at 73.66,137.287 h1.52
  text "-" at 78.74,137.287 h1.52
  text "-" at 40.64,137.033 h1.52
  text "+" at 45.847,137.033 h1.52
  text "-" at 57.277,137.033 h1.52
  text "+" at 62.357,137.033 h1.52
  text "+5V" at 63.627,106.553 h1.52
  text "+5V" at 74.041,106.553 h1.52
  text "-15V" at 62.357,104.14 h1.52
  text "+15V" at 74.041,104.14 h1.52
  text "-15V" at 62.357,101.6 h1.52
  text "+15V" at 74.041,101.6 h1.52
  text "GND" at 63.627,99.187 h1.52
  text "GND" at 74.041,98.933 h1.52
  text "GND" at 63.627,96.52 h1.52
  text "PA2" at 74.041,96.52 h1.52
  text "GND" at 63.627,93.853 h1.52
  text "PA0" at 74.041,93.853 h1.52
  text "GND" at 63.627,91.186 h1.52
  text "PA1" at 74.041,91.186 h1.52
  text "+5V" at 63.627,78.486 h1.52
  text "+5V" at 74.041,78.486 h1.52
  text "-15V" at 62.357,76.073 h1.52
  text "+15V" at 74.041,76.073 h1.52
  text "GND" at 63.627,73.533 h1.52
  text "GND" at 74.041,73.533 h1.52
  text "GND" at 63.627,71.12 h1.52
  text "PA7" at 74.041,71.12 h1.52
  text "GND3" at 199.517,69.088 h1.52
  text "GND3" at 211.074,69.088 h1.52
  text "GND" at 63.627,68.453 h1.52
  text "PA6" at 74.041,68.453 h1.52
  text "GND3" at 199.517,66.421 h1.52
  text "GND3" at 211.074,66.421 h1.52
  text "GND" at 63.627,65.786 h1.52
  text "PB0" at 74.041,65.786 h1.52
  text "C8" at 202.564,63.754 h1.52
  text "C6" at 211.074,63.754 h1.52
  text "GND" at 63.627,63.119 h1.52
  text "PB1" at 74.041,63.119 h1.52
  text "GND3" at 199.517,61.341 h1.52
  text "GND3" at 211.074,61.341 h1.52
  text "C9" at 202.564,58.801 h1.52
  text "C7" at 211.074,58.801 h1.52
  text "VCC3" at 199.517,56.261 h1.52
  text "VCC3" at 211.074,56.261 h1.52
  text "VCC3" at 199.517,53.848 h1.52
  text "VCC3" at 211.074,53.848 h1.52
  text "GND" at 63.627,49.657 h1.52
  text "PE9" at 74.041,49.657 h1.52
  text "GND" at 63.627,46.99 h1.52
  text "PE11" at 74.041,46.99 h1.52
  text "GND" at 63.627,44.45 h1.52
  text "PE13" at 74.041,44.45 h1.52
  text "GND" at 63.627,41.91 h1.52
  text "PE14" at 74.041,41.91 h1.52
  text "+15V" at 62.357,39.37 h1.52
  text "PE15" at 74.041,39.37 h1.52
  text "+15V" at 62.357,36.83 h1.52
  text "GND" at 74.041,36.83 h1.52
  text "GND" at 63.627,34.163 h1.52
  text "GND_arm" at 74.041,34.163 h1.52
Mechanical 1:
  lines w0.254: 26.924,30.226 26.924,187.706 26.924,194.818 217.424,194.818 217.424,30.226 26.924,30.226

## Text inside footprints (layer, text, board x,y; h text height)
FONTE: Top Overlay "14" at 58.547,185.547 h1.27; Top Overlay "7" at 58.547,183.007 h1.27; Top Overlay "1" at 38.735,183.007 h1.27; Top Overlay "8" at 38.735,185.547 h1.27
INVERSORA: Top Overlay "14" at 49.403,33.02 h1.27 r270; Top Overlay "7" at 46.863,33.02 h1.27 r270; Top Overlay "1" at 46.863,52.832 h1.27 r270; Top Overlay "8" at 49.403,52.832 h1.27 r270
ISOLADO: Top Overlay "14" at 207.391,95.377 h1.27 r90; Top Overlay "7" at 209.931,95.377 h1.27 r90; Top Overlay "1" at 209.931,75.565 h1.27 r90; Top Overlay "8" at 207.391,75.565 h1.27 r90
"NAO ISOLADO": Top Overlay "14" at 125.222,185.547 h1.27; Top Overlay "7" at 125.222,183.007 h1.27; Top Overlay "1" at 105.41,183.007 h1.27; Top Overlay "8" at 105.41,185.547 h1.27
P1: Top Overlay "50" at 93.132,40.508 h1.27 r270; Top Overlay "49" at 90.592,40.508 h1.27 r270; Top Overlay "1" at 90.592,106.04 h1.27 r270; Top Overlay "2" at 93.132,106.04 h1.27 r270
P2: Top Overlay "50" at 143.832,40.408 h1.27 r270; Top Overlay "49" at 141.292,40.408 h1.27 r270; Top Overlay "1" at 141.292,105.94 h1.27 r270; Top Overlay "2" at 143.832,105.94 h1.27 r270
"TRANS. CORRENTE": Top Overlay "14" at 49.403,90.043 h1.27 r270; Top Overlay "7" at 46.863,90.043 h1.27 r270; Top Overlay "1" at 46.863,109.855 h1.27 r270; Top Overlay "8" at 49.403,109.855 h1.27 r270
"TRANS. TENSAO": Top Overlay "14" at 49.403,61.849 h1.27 r270; Top Overlay "7" at 46.863,61.849 h1.27 r270; Top Overlay "1" at 46.863,81.661 h1.27 r270; Top Overlay "8" at 49.403,81.661 h1.27 r270